# Altium PCB PCB1.PcbDoc (part 2 of 2)
Units mm, origin at the board's own origin, x right, y up, seen from the top; angles counter-clockwise.
Board outline 100 x 47.75 mm, 2 copper layers (Top Layer, Bottom Layer), stack 1.67 mm thick; 77 components, 59 nets, 309 pads, 126 vias.
Unrouted connection lines stored in the file: 4.
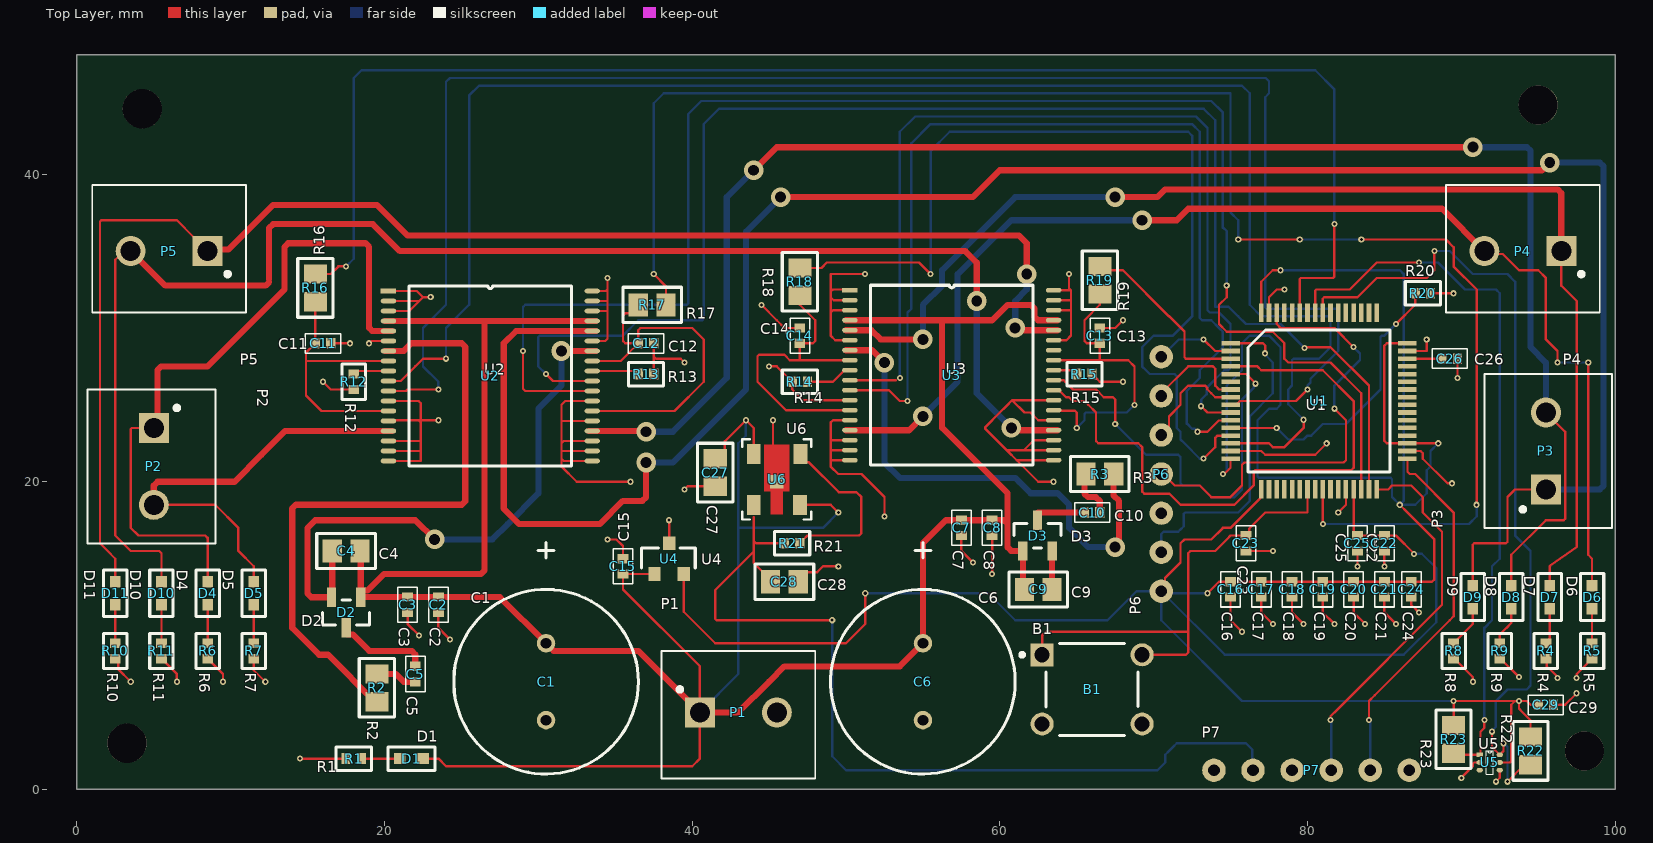
[diagram p0: Top Layer view]

## Part data (continued)
U2 U3: "Bridge Driver IC PowerSO-36, L6206PD, ST", Case/Package=SOIC, Collector Emitter Voltage (VCEO)=52V, Manufacturer=STMicroelectronics, Max Collector Current=2.8A, Max Operating Temperature=125°C, Max Output Current=5.6A, Min Operating Temperature=-25°C, Min Supply Voltage=8V, On-State Resistance=300mR, Operating Supply Current=5mA, Operating Supply Voltage=48V, Package Quantity=31, Supplier Part Number 1=497-5341-5-ND, Category="Motor Drivers", ComponentLink1Description=https://datasheet.ciiva.com/15109/getdatasheetpartid-189010-15109428.pdf?src-supplier=Verical, ComponentLink1URL=https://datasheet.ciiva.com/15109/getdatasheetpartid-189010-15109428.pdf?src-supplier=Verical, ComponentLink2Description=https://datasheet.ciiva.com/19477/1470178-19477478.pdf?src-supplier=Jameco, ComponentLink2URL=https://datasheet.ciiva.com/19477/1470178-19477478.pdf?src-supplier=Jameco, ComponentLink3Description=https://datasheet.ciiva.com/26880/l6206pd-26880436.pdf?src-supplier=IIIC, ComponentLink3URL=https://datasheet.ciiva.com/26880/l6206pd-26880436.pdf?src-supplier=IIIC, ComponentLink4Description=https://datasheet.ciiva.com/1957/cd00002346-1957105.pdf?src-supplier=Digi-Key, ComponentLink4URL=https://datasheet.ciiva.com/1957/cd00002346-1957105.pdf?src-supplier=Digi-Key, ComponentLink5Description=https://datasheet.ciiva.com/16370/cd00002346-16370975.pdf?src-supplier=Future+Electronics, ComponentLink5URL=https://datasheet.ciiva.com/16370/cd00002346-16370975.pdf?src-supplier=Future+Electronics, Height=3.3mm, Length=16mm, Manufacturer Part Number=L6206PD, Max Supply Voltage=52V, Motor Type=Brushed, Mount="Surface Mount", Number of Outputs=4, Number of Pins=36, Output Current=2.8A, Output Current per Channel=2.8A, Output Voltage=52V, Packaging=Rail/Tube, Pricing 1="1=6.49000, 10=5.85900, 25=5.58640, 100=4.63250, 250=4.22376, 500=3.95126, 1000=3.54250, 2500=3.40625, 5000=3.35175 (USD)", Radiation Hardening=No, REACH SVHC="No SVHC", Release Time=550ns, Rise Time=250ns, RoHS=Yes, Stock 1=6312, Supplier 1=Digi-Key, Width=11.1mm
U4: library part LDO, "V-Ref Precision 3.3V 20mA Automotive 3-Pin SOT-23 T/R", Case/Package=TO-236-3, Dropout Voltage=1.4V, Manufacturer="ON Semiconductor", Max Input Voltage=28V, Max Operating Temperature=125°C, Max Supply Current=220uA, Min Operating Temperature=-40°C, Min Output Voltage=3.3V, Output Current=20mA, Quiescent Current=200uA, Supplier Part Number 1=NCV51460SN33T1GOSCT-ND, Category="Voltage References", ComponentLink1Description=https://media.digikey.com/pdf/Data%20Sheets/ON%20Semiconductor%20PDFs/NCV51460_Web.pdf?src-supplier=Digi-Key, ComponentLink1URL=https://media.digikey.com/pdf/Data%20Sheets/ON%20Semiconductor%20PDFs/NCV51460_Web.pdf?src-supplier=Digi-Key, ComponentLink2Description=http://www.farnell.com/datasheets/2585557.pdf?src-supplier=Farnell, ComponentLink2URL=http://www.farnell.com/datasheets/2585557.pdf?src-supplier=Farnell, Manufacturer Part Number=NCV51460SN33T1G, Mount="Surface Mount", Number of Regulators=1, Output Configuration=Positive, Output Type=Fixed, Packaging="Cut Tape", Pricing 1="1=0.95000, 10=0.84800, 25=0.80520, 100=0.61810, 250=0.54624, 500=0.51750, 1000=0.40250 (USD)", RoHS=No, Stock 1=3394, Supplier 1=Digi-Key
U5: "SENSOR DIGITAL -40C-125C 6SOT", Case/Package=SOT-563, Manufacturer="Texas Instruments", Max Operating Temperature=125°C, Min Operating Temperature=-40°C, Operating Supply Voltage=3.6V, Quiescent Current=10uA, Supplier Part Number 1=296-40676-1-ND, Category="Temperature and Humidity Sensors", ComponentLink1Description=http://www.ti.com/general/docs/lit/getliterature.tsp?genericPartNumber=TMP102-Q1&&fileType=pdf&src-supplier=Avnet, ComponentLink1URL=http://www.ti.com/general/docs/lit/getliterature.tsp?genericPartNumber=TMP102-Q1&&fileType=pdf&src-supplier=Avnet, ComponentLink2Description=http://www.ti.com/lit/gpn/tmp102-q1?src-supplier=Mouser, ComponentLink2URL=http://www.ti.com/lit/gpn/tmp102-q1?src-supplier=Mouser, ComponentLink3Description=http://www.ti.com/general/docs/suppproductinfo.tsp?distId=10&gotoUrl=http%3A%2F%2Fwww.ti.com%2Flit%2Fgpn%2Ftmp102-q1&src-supplier=Digi-Key, ComponentLink3URL=http://www.ti.com/general/docs/suppproductinfo.tsp?distId=10&gotoUrl=http%3A%2F%2Fwww.ti.com%2Flit%2Fgpn%2Ftmp102-q1&src-supplier=Digi-Key, Interface=I2C,SMBus,2-Wire, Lead Free="Lead Free", Manufacturer Part Number=TMP102AQDRLRQ1, Mount="Surface Mount", Number of Pins=6, Output Type=I2C,Digital, Packaging="Tape and Reel", Pricing 1="1=1.92000, 5=1.81600, 10=1.55700, 25=1.24560, 50=1.14180, 100=1.03800, 500=0.90826, 1000=0.80445 (USD)", Resolution=11b, RoHS=Yes, Stock 1=4768, Supplier 1=Digi-Key
U6: library part LDO_5V, "Linear Regulator Positive 5V 4.5mA 5-Pin SOT-89 T/R", Manufacturer=ABLIC, Supplier Part Number 1=1662-2067-1-ND, Manufacturer Part Number=S-875065CUP-ACIT2U, Pricing 1="1=1.06000, 10=0.94400, 25=0.89600, 100=0.68800 (USD)", Stock 1=100, Supplier 1=Digi-Key

## Free pads (board coordinates)
  round 2.54 hole 2.54 unplated: M1(3.25,3) M2(98,2.5) M3(95,44.5) M4(4.25,44.25)

## Via types
v1: diameter 0.4, hole 0.2, Top Layer to Bottom Layer, 108 vias
v2: diameter 1.27, hole 0.711, Top Layer to Bottom Layer, 18 vias

## Nets (pads, with @x,y where several pads share a name; then routed paths per layer and width w, separated by ;. In a path a pad name is that pad's centre, name@x,y a point inside that pad or via, vN(x,y) a via of type N, cw(c..) or ccw(c..) an arc to the next point about the centre after c; other vN are vias at no path point)
3V3: 
5V: 
Front_fwd_out: 
Front_rev_out: 
GND: B1.3 B1.4 C1.1 C6.1 P1.2 P6.3 P7.3
  other v1: 92.25,0.5 90,0.75 14.5,2 97.5,6.25 3.5,7 6.5,7 9.5,7 12.25,7 90.75,7 96.25,7.25 97.5,7.25 93.75,7.3 24.25,9.75 22.25,10 75.75,10.25 77.75,10.75 79.75,10.75 81.75,10.75 83.75,10.75 85.75,10.75 87.25,11.5 59.5,14 49.5,14.5 83.25,14.5 85,14.5 58.25,14.75 77.75,15.5 34.5,16.25 38.5,17.5 52.5,17.75 82,18 39.5,19.5 89.399,19.899 36,20 63.5,20 81.25,22.5 23.5,24 45.25,24 16,26.5 68,26.5 89.75,26.75 45,27.5 39.5,27.75 17.75,29 19,29 87.75,29.25 68,30.5 44.5,31.5 23,32 89.501,32.25 78.5,32.5 34.5,33.25 51.225,33.5 64.5,33.5
JTDI: 
Left_fwd_out: 
Left_rev_out: 
NetB1_3: 
NetC5_1: 
NetC5_2: 
NetC10_1: 
NetC10_2: 
NetC11_2: 
NetC12_2: 
NetC13_2: 
NetC14_2: 
NetC26_2: 
NetD1_1: 
NetD5_2: 
NetD6_2: 
NetD8_2: 
NetD9_2: 
NetD10_2: 
NetD11_2: 
NetR12_2: 
NetR13_1: 
NetR14_2: 
NetR15_2: 
NetR16_2: 
NetR17_2: 
NetR18_2: 
NetR19_2: 
NetR20_2: 
NetR21_1: 
NetU1_14: 
NetU1_15: 
NetU1_52: 
NetU1_53: 
NetU1_57: 
NetU1_58: 
NetU1_59: 
NetU1_62: 
NJTRST: 
Rear_fwd_out: 
Rear_rev_out: 
Right_fwd_out: 
Right_rev_out: 
SW_CLK: 
SWDIO: 
SWO: 
temp_adc: 
USART_RX: 
USART_TX: 
VBOOT_Body: 
VBOOT_Drive: 
VCP_Body: 
VCP_Drive: 
VS_A_Body: 
pads on no net: B1.1 B1.2 C1.2 C2.1 C2.2 C3.1 C3.2 C4.1 C4.2 C5.1 C5.2 C6.2 C7.1 C7.2 C8.1 C8.2 C9.1 C9.2 C10.1 C10.2 C11.1 C11.2 C12.1 C12.2 C13.1 C13.2 C14.1 C14.2 C15.1 C15.2 C16.1 C16.2 C17.1 C17.2 C18.1 C18.2 C19.1 C19.2 C20.1 C20.2 C21.1 C21.2 C22.1 C22.2 C23.1 C23.2 C24.1 C24.2 C25.1 C25.2 C26.1 C26.2 C27.1 C27.2 C28.1 C28.2 C29.1 C29.2 D1.A D1.K D2.1 D2.2 D2.3 D3.1 D3.2 D3.3 D4.A D4.K D5.A D5.K D6.A D6.K D7.A D7.K D8.A D8.K D9.A D9.K D10.A D10.K D11.A D11.K P1.1 P2.1 P2.2 P3.1 P3.2 P4.1 P4.2 P5.1 P5.2 P6.1 P6.2 P6.4 P6.5 P6.6 P6.7 P7.1 P7.2 P7.4 P7.5 P7.6 R1.1 R1.2 R2.1 R2.2 R3.1 R3.2 R4.1 R4.2 R5.1 R5.2 R6.1 R6.2 R7.1 R7.2 R8.1 R8.2 R9.1 R9.2 R10.1 R10.2 R11.1 R11.2 R12.1 R12.2 R13.1 R13.2 R14.1 R14.2 R15.1 R15.2 R16.1 R16.2 R17.1 R17.2 R18.1 R18.2 R19.1 R19.2 R20.1 R20.2 R21.1 R21.2 R22.1 R22.2 R23.1 R23.2 U1.1 U1.2 U1.3 U1.4 U1.5 U1.6 U1.7 U1.8 U1.9 U1.10 U1.11 U1.12 U1.13 U1.14 U1.15 U1.16 U1.17 U1.18 U1.19 U1.20 U1.21 U1.22 U1.23 U1.24 U1.25 U1.26 U1.27 U1.28 U1.29 U1.30 U1.31 U1.32 U1.33 U1.34 U1.35 U1.36 U1.37 U1.38 U1.39 U1.40 U1.41 U1.42 U1.43 U1.44 U1.45 U1.46 U1.47 U1.48 U1.49 U1.50 U1.51 U1.52 U1.53 U1.54 U1.55 U1.56 U1.57 U1.58 U1.59 U1.60 U1.61 U1.62 U1.63 U1.64 U2.1 U2.2 U2.3 U2.4 U2.5 U2.6 U2.7 U2.8 U2.9 U2.10 U2.11 U2.12 U2.13 U2.14 U2.15 U2.16 U2.17 U2.18 U2.19 U2.20 U2.21 U2.22 U2.23 U2.24 U2.25 U2.26 U2.27 U2.28 U2.29 U2.30 U2.31 U2.32 U2.33 U2.34 U2.35 U2.36 U3.1 U3.2 U3.3 U3.4 U3.5 U3.6 U3.7 U3.8 U3.9 U3.10 U3.11 U3.12 U3.13 U3.14 U3.15 U3.16 U3.17 U3.18 U3.19 U3.20 U3.21 U3.22 U3.23 U3.24 U3.25 U3.26 U3.27 U3.28 U3.29 U3.30 U3.31 U3.32 U3.33 U3.34 U3.35 U3.36 U4.A U4.G U4.K U5.1 U5.2 U5.3 U5.4 U5.5 U5.6 U6.1 U6.2 U6.3 U6.4 U6.5
copper on no net: | length 2785
  Top Layer w0.15: 2.5,8.5 2.508,8.5 2.681,8.327 2.681,7.819 3.5,7 ; 2.5,9.5 2.5,12 ; 2.5,13.5 2.5,14.851 2.5,15 2,15.5 1.5,16 1.5,36.912 1.588,37 6.5,37 7.6,35.9 8.5,35 ; 3.5,35 3.073,35 2.5,34.427 2.5,16.5 3.5,15.5 5.351,15.5 5.5,15.351 5.5,13.5 ; 5,18.5 9,18.5 10.5,17 10.5,15.5 11.5,14.5 11.5,13.5 ; 5,23.5 3.588,23.5 3.5,23.412 3.5,17 4,16.5 8.351,16.5 8.5,16.351 8.5,13.5 ; 5.5,8.5 5.55,8.5 5.723,8.327 5.723,8.277 6.5,7.5 6.5,7 ; 5.5,9.5 5.5,12 ; 8.5,8.5 8.55,8.5 8.723,8.327 8.723,8.277 9.5,7.5 9.5,7 ; 8.5,9.5 8.5,12 ; 11.5,8.5 11.5,7.75 12.25,7 ; 11.5,9.5 11.5,12 ; 14.5,2 17.5,2 ; 15.5,31.7 15.5,29 14.9,28.4 14.9,27.85 ; 15.5,33.5 16.5,33.5 17,34 v1(17.5,34) ; 16,26.5 16.5,26 18,26 ; 16.5,29 17.75,29 ; 16.55,12.495 16.6,12.545 ; 18,27 18.2,27.2 20.25,27.2 ; 18.4,12.555 18.455,12.5 18.45,12.495 ; 18.5,2 21,2 ; 19,29 19.15,29.15 20.25,29.15 ; 20.25,21.35 22.35,21.35 22.35,22 ; 20.25,22 20.5,22 22,22 22.35,22 ; 20.25,22.65 22.35,22.65 ; 20.25,23.95 20.612,23.95 20.662,24 22.201,24 ; 20.25,24.6 15.9,24.6 14.9,25.6 14.9,27.85 ; 20.25,25.25 20.588,25.25 22.201,25.25 22.35,25.101 22.35,24.85 22.35,23.851 ; 20.25,25.9 21.4,25.9 21.5,26 v1(23.5,26) ; 20.25,26.55 21.05,26.55 22,27.5 22.5,28 v1(24,28) ; 20.25,27.85 14.9,27.85 ; 20.25,31.1 21.6,31.1 22.25,31.75 ; 20.25,31.75 22.25,31.75 ; 20.25,32.4 22.1,32.4 22.5,32 ; 20.588,28.5 20.609,28.521 ; 21.5,11.5 21.5,10.75 22.25,10 ; 22.5,2 23.5,2 24,1.5 40,1.5 40.5,2 40.5,5 40.5,8 35.5,13 35.5,14 37.55,14 ; 23,32 22.5,32 ; 23.5,11.5 23.5,10.5 24.25,9.75 ; 23.5,24 22.201,24 ; v1(29,28.5) 29,26.049 29.149,25.9 33.5,25.9 ; v1(30.5,27) 30.95,26.55 33.5,26.55 ; 33.5,21.35 31.65,21.35 31.5,21.5 ; 33.5,22 31.5,22 ; 33.5,22.65 31.65,22.65 31.5,22.5 ; 33.5,23.95 31.55,23.95 31.5,24 ; 33.5,24.6 38.85,24.6 40.75,26.5 40.75,29.25 40,30 36.649,30 36.5,29.851 36.5,29 ; 33.5,25.25 31.75,25.25 31.5,25 31.5,24 ; 33.5,27.2 36.3,27.2 36.5,27 ; 33.5,27.85 35.35,27.85 36.5,29 ; 33.5,29.15 34.35,29.15 34.5,29.3 34.5,31.1 34.5,31.75 ; 33.5,31.1 34.45,31.1 34.5,31.15 ; 33.5,31.75 34.5,31.75 ; 33.5,32.4 34.4,32.4 34.45,32.45 34.5,32.5 ; 34.5,16.25 35.078,16.25 35.5,15.828 35.5,15 ; 34.5,33.25 34.5,32.5 ; 36,20 32.5,20 31.5,21 31.5,21.5 ; 36.5,31.5 36.5,31.443 36.002,30.945 35.649,30.945 35.5,30.797 35.5,29.149 35.649,29 36.5,29 ; 37.5,27 37.5,28.149 ; 37.5,29 37.5,28.149 ; v1(37.5,33.5) 38.3,32.7 38.3,31.5 ; 38.5,16 38.5,17.5 ; 39.45,14 39.45,11.55 41.5,9.5 50,9.5 51.25,10.75 v1(51.25,12.75) ; 39.5,19.5 39.7,19.7 41.5,19.7 ; 39.5,27.75 39.25,28 37.649,28 37.5,28.149 ; 41.5,21.5 41.625,21.5 42.123,21.998 42.123,22.623 v1(43.5,24) 44,23.5 44,21.802 ; 44,17.713 44,16.5 44,16.149 ; 44.5,31.5 45.5,30.5 46,30 47,30 ; 45,27.5 45.5,27.5 46.5,26.5 46.5,26 47,25.5 47.2,25.3 50.25,25.3 ; 45.1,13.5 45.1,13.625 44,14.725 44,15.466 ; 45.25,24 45.25,20.25 45.5,20 ; 46,16 44.149,16 44,16.149 ; 46.9,13.5 46.9,13.625 47.398,14.123 48.123,14.123 48.5,14.5 49.5,14.5 ; 47,16 47,16.05 47.173,16.223 47.223,16.223 47.5,16.5 50.851,16.5 51,16.649 51,19 50.686,19.314 49.536,19.314 47.571,21.279 47.371,21.279 47.048,21.602 47.048,21.802 ; 47,18.5 49,18.5 v1(49.5,18) ; 47,28 47,29 47.851,29 48,29.149 48,30.5 47,31.5 47,32 ; 47,33.9 48.4,33.9 48.75,34.25 54.75,34.25 v1(55.5,33.5) ; 47.5,26.5 48.575,26.5 ; 48,26.5 49.15,26.5 49.9,27.25 50.25,27.25 ; v1(49.101,11) 41.588,11 41.5,11.088 41.5,12.966 44,15.466 ; 50.25,21.4 49.1,21.4 49,21.5 ; 50.25,22.05 49.05,22.05 49,22 ; 50.25,22.7 49.024,22.7 49,22.676 ; 50.25,24 49.149,24 49,23.851 49,22.676 ; 50.25,24.65 46.1,24.65 44.25,26.5 44.25,28.162 44.338,28.25 46,28.25 46.35,27.9 47,27.9 48,27.9 48.149,27.9 48.649,27.9 48.9,27.9 50.25,27.9 ; 50.25,25.95 52.8,25.95 53.5,25.25 v1(54,25.25) ; 50.25,26.6 53.25,26.6 ; 50.25,29.2 49.888,29.2 49.3,29.2 49,29.5 49,31 ; 50.25,31.15 49.15,31.15 49,31 ; 50.25,31.8 49.2,31.8 49,32 ; 50.25,32.45 50.2,32.5 49.149,32.5 49,32.351 ; 51.225,33.5 49,33.5 49,32.351 ; 52.5,17.75 52.5,19 51,20.5 50,20.5 49.5,20.5 49,21 49,21.5 ; 57.5,16.5 57.5,15.5 58.25,14.75 ; 59.5,14 59.5,16.5 ; 62.75,8.75 62.75,10 63,10.25 72.25,10.25 ; 63.5,20 62.5,20 61.1,21.4 ; 63.5,21.4 61.1,21.4 ; 63.5,22.05 61.55,22.05 ; 63.5,22.7 62.2,22.7 61.55,22.05 ; 63.5,24 62.5,24 62,24.5 61.6,24.5 60.8,25.3 ; 63.5,24.65 63.862,24.65 63.887,24.625 64.875,24.625 65,24.5 v1(65,23.5) ; 63.5,25.3 60.8,25.3 ; 63.5,25.95 63.85,25.95 64.3,25.5 64.5,25.5 64.75,25.25 65,25.25 65.5,25.25 65.75,25 66.25,24.5 66.25,22.649 66.399,22.5 68.75,22.5 69,22.5 69.25,22.25 69.25,19.364 69.399,19.215 71.035,19.215 71.75,18.5 75.25,18.5 76.5,19.75 76.5,20.662 76.588,20.75 76.75,20.75 80.5,20.75 82.851,20.75 83,20.899 83,25.25 81,27.25 80.15,27.25 78.451,27.25 77.601,27.25 77,27.25 76.75,27.5 75,27.5 ; 63.5,26.6 63.509,26.591 64.159,26.591 64.25,26.5 64.75,26 66.25,26 66.75,25.5 67.351,25.5 67.5,25.351 v1(67.5,23.75) ; 63.5,27.25 64.75,27.25 65,27 ; 63.5,27.9 63.9,27.9 64,27.9 66.5,27.9 67.35,27.9 68.35,27.9 68.75,27.5 v1(68.75,25) ; 63.5,29.2 64.331,29.2 64.631,29.5 64.631,31.8 ; 63.5,31.15 64.6,31.15 ; 63.5,31.8 64.631,31.8 ; 63.5,32.45 64.607,32.45 64.631,32.426 64.5,32.557 64.5,32.75 64.5,33.5 ; 64.631,32.45 64.631,31.8 ; 66,27 66,26.95 66.173,26.777 66.223,26.777 66.5,26.5 68,26.5 ; 66.5,28 66.5,29 65.649,29 65.5,29.149 65.5,30.5 66.5,31.5 66.5,32.2 ; 66.5,30 67.5,30 68,30.5 ; 66.5,34 66.75,33.75 68,33.75 71,30.75 71.024,30.75 72,29.774 72,28.088 72.088,28 75,28 ; 69.25,8.75 72.101,8.75 72.25,8.899 72.25,15.351 72.399,15.5 74,15.5 74.75,16.25 75,16.5 76,16.5 76.042,16.5 76.215,16.673 76.215,16.965 77.25,18 78.351,18 80,18 80,19.5 ; 70.46,18 70.5,17.96 70.824,17.96 ; 70.5,12.88 70.743,13.123 70.743,13.743 71.75,14.75 71.75,16 72,16.25 73.75,16.25 74.5,17 75,17 76.977,18.977 76.977,19.477 77,19.5 ; 70.5,20.5 70.616,20.5 71.366,19.75 72,19.75 73,19.75 73.75,19 74.75,19 75,19 75.75,19.75 75.75,20 75.75,21.101 75.899,21.25 82.351,21.25 82.5,21.399 82.5,22.75 82.5,24 v1(81.75,24.75) ; 70.5,23.04 70.71,23.25 70.851,23.25 71,23.399 71,24 71,24.25 71.75,25 71.75,25.75 72.25,26.25 73.331,26.25 73.48,26.101 73.48,26.02 73.75,25.75 74,25.5 75,25.5 ; 70.5,25.58 70.5,25.75 72.25,27.5 73.75,27.5 73.851,27.5 74,27.351 74,26.5 74,26.25 74.25,26 75,26 ; v1(72.859,23.25) 73.5,23.25 74.235,23.985 74.985,23.985 75,24 ; v1(73.088,24.912) 73.5,24.5 75,24.5 ; v1(73.25,21.5) 74,22.25 74,22.851 74.149,23 75,23 ; v1(73.25,29.25) 74,28.5 75,28.5 ; v1(73.5,12.75) 74.25,13.5 75,13.5 77,13.5 79,13.5 81,13.5 83,13.5 85,13.5 86.75,13.5 87.5,13.5 88.101,13.5 88.25,13.649 88.25,16.25 86.5,18 v1(86,18.5) ; v1(74.5,20.5) 74.593,20.5 75,20.907 75,21.5 ; v1(74.75,32.75) 74.75,32 74.25,31.5 74.25,30.75 74.25,30.25 74.75,29.75 77.75,29.75 78.5,29 78.5,28 78.75,27.75 81.5,27.75 83.5,25.75 83.5,24.25 83.5,19.5 ; 75,12.5 75,11 75.75,10.25 ; 75,22 77,22 77.25,21.75 80.5,21.75 81.25,22.5 ; 75,22.5 77.5,22.5 77.75,22.25 78.5,22.25 79.75,23.5 v1(79.75,24.033) ; 75,23.5 v1(78,23.5) ; 75,25 75.45,25 75.473,25.023 75.473,25.101 75.622,25.25 79.25,25.25 v1(80,26) ; 75,27 76.024,27 v1@76.625,26.399 ; 75,29 77.101,29 77.25,28.851 v1(77.25,28.35) ; v1(75.5,35.75) v1(79.5,35.75) v1@79.675,35.75 ; 76,15.5 77.75,15.5 ; 77,12.5 77,11.5 77.75,10.75 ; 77,31 77,33 77.75,33.75 78,33.75 ; 77.5,31 77.5,32 78,32.5 78.5,32.5 ; 78,31 78,30.25 78.25,30 81.75,30 v1(83,28.75) ; 79,12.5 79,11.5 79.75,10.75 ; 79.5,31 79.5,33.162 79.588,33.25 81.662,33.25 81.75,33.338 v1(81.75,36.75) ; v1@79.798,28.75 81.5,28.75 84,26.25 84,19.5 ; 80.5,31 80.5,32.412 80.588,32.5 82.75,32.5 84.5,34.25 v1(87.25,34.25) ; 81,12.5 81,11.5 81.75,10.75 ; v1(81,17.25) 81,19.5 ; 81,31 81,31.912 81.088,32 83.25,32 84.5,33.25 84.75,33.25 87.75,33.25 88.25,33.75 v1(88.25,35) ; v1(81.5,4.5) 81.5,4.75 82.25,5.5 ; 81.75,5 88.75,12 88.75,16.75 87.5,18 87.5,19 86.75,19.75 85.5,19.75 85.25,19.5 84.5,19.5 ; 82,18 82.5,18.5 82.5,19.5 ; 83,12.5 83,11.5 83.75,10.75 ; 83,19.5 83,16.75 83.25,16.5 85,16.5 85.75,16.5 v1(86.936,15.314) ; 83.25,14.5 83.25,15.5 ; v1(83.5,35.75) 89,35.75 89.5,35.25 89.5,34 91,32.5 v1(91,18.5) ; v1(84,4.5) 84,5.75 84.375,6.125 89.25,11 89.5,11.25 89.5,13.5 89.5,18 87,20.5 86.649,20.5 86.5,20.649 86.5,21.5 ; 85,12.5 85,11.5 85.75,10.75 ; 85,14.5 85,15.5 ; v1(85.75,30.25) 87,31.5 87,32.25 ; 86.5,22 87.351,22 87.5,21.851 87.5,21.5 89.101,19.899 89.399,19.899 ; 86.5,28 88.75,28 ; 86.5,28.5 87.75,28.5 87.75,29.25 ; 86.5,29 85.149,29 85,28.851 85,22.649 85.149,22.5 86.5,22.5 v1(88.5,22.5) ; 86.75,12.5 86.75,12 87.25,11.5 ; 88,32.25 89.501,32.25 ; 89.5,2.35 89.6,2.25 91.2,2.25 91.25,2.3 91.25,3.75 91.5,4 v1(91.5,4.5) ; 89.5,4.15 v1(89.5,5.75) 93.474,5.75 v1(93.75,5.75) ; 89.5,9.5 90.75,10.75 90.75,11.893 ; 89.723,8.277 89.723,8.327 89.55,8.5 ; 89.75,26.75 89.75,28 ; 90,0.75 90.25,1 90.75,1.5 90.75,1.662 90.838,1.75 91.2,1.75 ; 90.75,7 90.75,7.3 89.55,8.5 ; 90.75,13.168 90.75,15.912 90.838,16 92.912,16 93,16.088 93,19 93.5,19.5 95.5,19.5 ; 91.5,35 91.7,34.8 92.7,34.8 93.75,33.75 95,33.75 95.5,33.25 95.5,29.25 96.25,28.5 v1(96.251,27.75) ; v1(92,3.75) 92,2.75 92.5,2.25 92.75,2.5 v1(92.75,3) ; 92.25,0.5 92.5,0.75 92.5,1.25 ; 92.5,1.75 93.162,1.75 93.25,1.838 93.25,5.5 93.474,5.724 ; 92.5,8.5 92.55,8.5 93.75,7.3 ; 92.5,9.5 92.5,10.062 93.091,10.653 ; 92.932,10.494 93.25,10.813 93.25,11.75 ; v1(93,0.5) 94.1,1.6 94.5,1.6 ; 93.25,13.25 93.25,15.25 95.5,17.5 96.662,17.5 96.75,17.588 96.75,23.25 95.5,24.5 ; 94.5,3.4 94.5,4.5 94,5 93.75,5.25 v1(93.75,5.75) ; 95,5.5 94.5,5.5 94.25,5.75 v1(93.75,5.75) ; 95.5,8.5 95.562,8.438 95.562,8.006 96.202,7.365 96.246,7.322 96.25,7.322 ; 95.5,9.5 95.55,9.5 95.723,9.673 95.723,9.795 95.75,9.822 95.75,11.75 ; 95.75,13.25 95.75,14.5 95.794,14.544 97.5,15.752 97.5,31.75 96.5,32.75 96.5,35 ; 96,5.5 96.75,5.5 97.5,6.25 ; 97.5,7.25 97.5,7.5 98.225,8.225 98.225,8.275 98.45,8.5 ; v1(98.251,27.75) 98.251,15.249 98.5,15 98.5,13.25 ; 98.277,8.277 98.277,8.327 98.45,8.5 ; 98.5,9.5 98.5,11.75 ; 22.201,24 22.35,23.851 ; 22.25,31.75 22.5,32 ; 22.35,22 22.35,22.65 ; 22.35,22.65 22.35,23.851 ; 31.5,21.5 31.5,22 ; 31.5,22 31.5,22.5 ; 31.5,22.5 31.5,24 ; 34.5,31.75 34.5,32.4 34.5,32.5 ; 44,15.466 44,16.149 ; 49,21.5 49,22 ; 49,22 49,22.676 ; 49,31 49,31.5 49,32 ; 49,32 49,32.351 ; 60.5,22 60.55,22.05 61.55,22.05 ; 60.5,22 59.062,23.438 59.062,23.562 60,24.5 60.4,24.9 60.8,25.3 ; 60.5,22 61.1,21.4 ; 89.55,8.5 89.5,8.5 89.55,8.5 ; 98.45,8.5 98.5,8.5 98.45,8.5
  Top Layer w0.2: 94.1,1.6 94.5,1.6
  Top Layer w0.4: 3.5,35 5.75,32.75 11.75,32.75 12.266,32.75 12.5,32.984 ; 5,18.5 5,19.75 5.25,20 10.25,20 12,21.75 13.55,23.3 20.5,23.3 ; 5,23.5 5.25,23.75 5.25,27.266 5.484,27.5 8.5,27.5 13,32 13.5,32.5 13.5,35.266 13.734,35.5 18.766,35.5 19,35.266 19,30 19.2,29.8 20.5,29.8 ; 8.5,35 8.591,35.091 9.841,35.091 12.75,38 19.5,38 20,37.5 21.5,36 61.25,36 61.75,35.5 v2(61.75,33.5) ; 12.5,33.149 12.5,33.5 12.5,36 12.5,36.25 12.5,36.5 12.75,36.75 19.25,36.75 21,35 57.75,35 58.5,34.25 v2(58.5,31.75) ; 16.6,15.5 16.6,12.545 16.55,12.495 15.234,12.495 15,12.729 15,17 15.5,17.5 22,17.5 v2(23.25,16.25) ; 17.5,10.505 17.5,10.18 17.605,10.075 17.93,10.075 19.005,9 21.766,9 22,8.766 22,8 ; 18.4,15.5 18.45,15.45 18.45,12.495 ; 19.5,5.7 19.375,5.7 16.325,8.75 15.75,8.75 14,10.5 14,18.266 14.234,18.5 25.016,18.5 25.25,18.734 25.25,28.766 25.016,29 21.75,29 21.25,28.5 20,28.5 ; 19.5,7.5 20.75,7.5 21.25,7 22,7 ; 20,30.45 33.75,30.45 ; 26.5,28.75 26.5,30.45 ; 26.5,29.75 26.5,14.234 26.266,14 22.25,14 19.955,14 18.88,12.925 18.555,12.925 18.45,12.82 18.45,12.495 ; v2(31.5,28.5) 33.75,28.5 ; 33.25,23.3 36.95,23.3 v2(37,23.25) ; 33.75,29.8 28.55,29.8 27.75,29 27.75,18.25 28.75,17.25 33.5,17.25 34,17.25 35.5,18.75 36.766,18.75 37,18.984 v2(37,21.25) ; v2(44,40.25) 45.5,41.75 v2(90.75,41.75) ; v2(45.75,38.5) 58.25,38.5 60,40.25 95.25,40.25 v2(95.75,40.75) ; 50,23.35 54.1,23.35 v2(55,24.25) ; 50,28.55 51.7,28.55 v2(52.5,27.75) ; 50,29.85 51.65,29.85 52.25,29.25 v2(55,29.25) ; 50,30.5 59.5,30.5 60.5,31.5 62.016,31.5 62.25,31.266 62.25,30.734 62.484,30.5 63.75,30.5 ; 56.25,30.5 56.25,23.5 60.5,19.25 60.5,17 ; v2(60.75,23.5) 60.9,23.35 63.75,23.35 ; v2(61,30) 61.15,29.85 63.75,29.85 ; 61.6,13 61.5,13.1 61.5,15.5 61.266,15.5 60.734,15.5 60.5,15.734 60.5,17.266 60.266,17.5 59.5,17.5 57.5,17.5 56.5,17.5 55,16 55,9.5 53.5,8 46,8 45,7 43,5 40.5,5 36.5,9 31.5,9 31,9 30.5,9.5 27.5,12.5 23.5,12.5 21.5,12.5 18.455,12.5 18.45,12.495 ; 62.45,17.49 62.5,17.54 62.5,18 65.5,18 ; 63.4,13 63.4,15.5 ; 65.6,20.5 65.5,20.4 65.5,19.234 65.734,19 66.25,19 66.5,18.75 66.5,18 ; 67.4,20.5 67.4,19.1 67.75,18.75 67.75,16 v2(67.5,15.75) ; v2(67.5,38.5) 70.25,38.5 70.75,39 96.266,39 96.5,38.766 96.5,35 ; v2(69.25,37) 71.5,37 72.25,37.75 85.25,37.75 88.75,37.75 91.5,35
  Bottom Layer w0.15: v1(17.5,34) 18,34.5 18,39.5 18,46.25 18.5,46.75 64.5,46.75 80.5,46.75 81.75,45.5 81.75,38.25 81.75,37.5 v1(81.75,36.75) ; v1(23.5,26) 23.5,26.5 22.5,27.5 22.5,30 24,31.5 24,46 24.25,46.25 64.594,46.25 77.289,46.25 77.5,46.039 77.5,45.25 77.25,45 77.25,31.338 77.338,31.25 81.851,31.25 82,31.101 82,28.5 80.194,26.694 80.194,26.444 80,26.25 v1(80,26) ; v1(24,28) 24,30 25.5,31.5 25.5,38.351 25.5,45.101 26.149,45.75 64.389,45.75 75.75,45.75 76.25,45.25 76.25,38.5 76.25,31.5 77,30.75 81.351,30.75 81.5,30.601 81.5,28.75 80.75,28 79.088,28 79,27.912 79,26.25 78.75,26 78.75,25.033 v1@79.785,23.998 ; v1(29,28.5) 29,31.351 29.149,31.5 39.662,31.5 39.75,31.588 39.75,37.162 39.75,43.912 40.588,44.75 64.347,44.75 73.75,44.75 74.5,44 74.5,37 74.5,36.5 74.544,36.5 74.75,36.294 v1(74.75,32.75) ; v1(30.5,27) 30,27.5 30,29.412 30.088,29.5 35.5,29.5 36.5,30.5 40.662,30.5 40.75,30.588 40.75,35.5 40.75,36.101 40.75,43.25 41.75,44.25 60.153,44.25 64.25,44.25 73.25,44.25 74,43.5 74,35.75 74,31.382 74.868,31.382 75.5,30.75 76,30.25 78.25,30.25 v1(79.798,28.702) ; v1(37.5,33.5) 37.5,37.851 37.5,44.601 38.149,45.25 64.311,45.25 75,45.25 75,38.25 75,37.5 75.5,37 v1(75.5,35.75) ; 40.5,5 43,7.5 43,22.5 43.484,22.984 43.484,23.984 v1(43.5,24) ; 43,17 48,17 48.5,17 v1(49.5,18) ; v1(49.101,11) 49.101,2.149 50,1.25 60.899,1.25 70.25,1.25 70.75,1.75 70.75,2.25 71,2.5 71.25,2.75 71.5,3 76,3 76.42,2.58 76.42,1.25 ; v1(51.25,12.75) 59.25,12.75 61,11 63.75,11 ; v1(53.5,26.75) 53.5,27.5 53.5,35.75 53.5,42.75 54.5,43.75 64,43.75 72.75,43.75 73.5,43 73.5,35.5 73.5,31.5 73.5,31.149 73.649,31 74.25,31 74.5,30.75 75,30.25 75,27.399 74.851,27.25 74.593,27.25 73.5,26.157 73.444,26.101 73.444,25.694 73.088,25.338 v1(73.088,24.912) ; v1(54,25.25) 54,31 54.25,31.25 54.25,35 54.25,42 55.5,43.25 64.021,43.25 72.5,43.25 73,42.75 73,35.25 73,31.75 73,30.649 73.149,30.5 73.75,30.5 74.25,30 74.5,29.75 74.5,28.75 73,27.25 73,26.75 72.161,25.911 72.161,23.778 72.494,23.444 72.665,23.444 v1(72.859,23.25) ; v1(55.5,33.5) 55.5,41.5 56.75,42.75 64,42.75 72.25,42.75 72.5,42.5 72.5,35 72.5,31.199 ; 63.5,11 67,11 68.88,12.88 70.5,12.88 ; v1(65,23.5) 65.5,24 65.5,24.412 65.588,24.5 68.25,24.5 v1(68.75,25) ; v1(67.5,23.75) 69.5,21.75 70,21.75 71.601,21.75 71.75,21.601 71.75,19.899 71.899,19.75 73,19.75 73.75,19 75.25,19 75.75,19.5 75.75,25.343 76.5,26.093 76.5,26.25 v1(76.625,26.375) ; 70.257,12.637 70.5,12.88 ; 70.5,15.42 70.5,16.601 70.649,16.75 71.601,16.75 71.75,16.899 71.963,17.112 71.963,17.912 72.051,18 75.5,18 76.25,18.75 76.25,24.25 77.75,25.75 77.75,27.75 77.25,28.25 v1@77.25,28.359 ; 70.5,28.12 71.63,29.25 72.25,29.25 v1(73.25,29.25) ; 72.5,31.5 72.5,30.75 71.25,29.5 70.25,29.5 70,29.5 69.25,28.75 69.25,28 69.25,27.5 69.5,27.25 69.75,27 71.351,27 71.5,26.851 71.5,23.5 71.75,23.25 71.75,23 71.75,22.75 72,22.5 73,21.5 v1(73.25,21.5) ; v1(73.5,12.75) 70.63,12.75 ; v1(74.5,20.5) 74.75,20.75 74.75,26.25 75,26.5 75.75,27.25 75.75,27.5 75.75,29 76.25,29.5 77.5,29.5 78.25,28.75 78.25,26.25 78.25,25.75 78.25,25 78,24.75 77.5,24.75 76.75,24 76.75,20.338 76.838,20.25 85.412,20.25 85.5,20.162 85.5,19 v1(86,18.5) ; v1(78,23.5) 78.75,22.75 79.75,22.75 80,23 80.25,23 81,23.75 82.5,23.75 84.75,26 84.75,29.412 84.838,29.5 85,29.5 v1(85.75,30.25) ; v1(78.25,33.75) 80.838,33.75 86.013,33.75 86.25,33.513 86.25,18.75 v1(86,18.5) ; v1(79.5,35.75) v1(83.5,35.75) ; v1(81,17.25) 81.774,17.25 90.5,17.25 91,17.75 v1(91,18.5) ; v1(81.5,4.5) 81.54,4.46 81.54,1.25 ; v1(81.75,24.75) 81.75,26.25 83.411,27.911 83.411,28.339 v1(83,28.75) ; v1(84,4.5) 84.08,4.42 84.08,1.25 ; v1(86.936,15.314) 87.436,15.314 88.365,14.385 88.365,10.865 86.25,8.75 74.63,8.75 70.63,12.75 ; v1(87.25,34.25) 88.493,34.25 90.243,32.5 92.25,32.5 92.5,32.25 92.5,15 92,14.5 92,11 91.5,10.5 91.5,5 v1(91.5,4.5) ; v1(88.25,35) 89.25,35 90.5,33.75 90.75,33.5 93,33.5 93.5,33 93.5,16.5 94.5,15.5 94.5,6.75 94.25,6.5 93,6.5 92.25,5.75 92.25,4.25 92.25,4.068 92,3.818 v1(92,3.75) ; v1(88.5,22.5) 88,22 88,21 87.75,20.75 87.75,19.25 87,18.5 v1(86,18.5) ; v1(89.5,5.75) 75.75,5.75 70.5,11 70.5,12.88 ; v1(92.75,3) 93,2.75 93,1.5 93,1.25 v1(93,0.5) ; v1(96.251,27.75) v1(98.251,27.75) ; 70.5,12.88 70.63,12.75
  Bottom Layer w0.4: v2(23.25,16.25) 27,16.25 28,17.25 30,19.25 30,24.75 31.5,26.25 v2@31.5,28.412 ; v2(37,21.25) 38.75,21.25 43.5,26 43.5,30 43.5,34 43.5,36.25 v2(45.75,38.5) ; v2(37,23.25) 38.75,23.25 42.25,26.75 42.25,30.25 42.25,38.5 v2(44,40.25) ; v2(52.5,27.75) 52.5,21.25 53.5,20.25 61,20.25 61.25,20 62,19.25 63.75,19.25 64.5,18.5 64.5,17 65.75,15.75 v2(67.5,15.75) ; v2(55,24.25) 57.25,26.5 57.25,33.25 57.25,33.5 59,35.25 60.75,37 64.25,37 v2(69.25,37) ; v2(55,29.25) 55,31.5 56.25,32.75 56.25,33.75 57,34.5 61,38.5 61.5,38.5 66.5,38.5 ; v2(58.5,31.75) 58.5,25.75 v2(60.75,23.5) ; v2(61,30) 61,31.75 61.75,32.5 v2(61.75,33.5) ; 66,38.5 v2(67.5,38.5) ; v2(90.75,41.75) 94.266,41.75 94.5,41.516 94.5,28.75 95.5,27.75 95.5,24.5 ; 95.5,19.5 99.016,19.5 99.25,19.734 99.25,40.516 99.016,40.75 v2(95.75,40.75)

## Polygon pours and split planes (outlines as drawn)
GND on Bottom Layer "Ground Layer" (solid, pour order 1): 0.25,0.25 0.25,47.5 99.75,47.5 99.75,0.25
GND on Bottom Layer "Ground Layer" (solid, pour order 0): 0.25,0.5

## Other copper
Top Layer:
  pour cut-out: 47.25,42.25